# EAGLE board STM32G0_Breakout_Board (EAGLE 9.4.2)
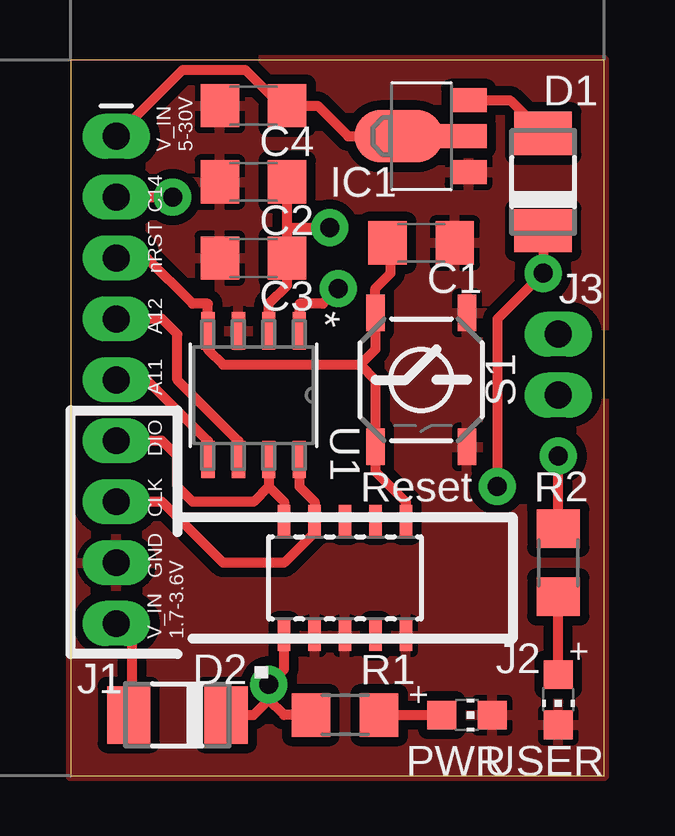
[diagram p0: board, top side]
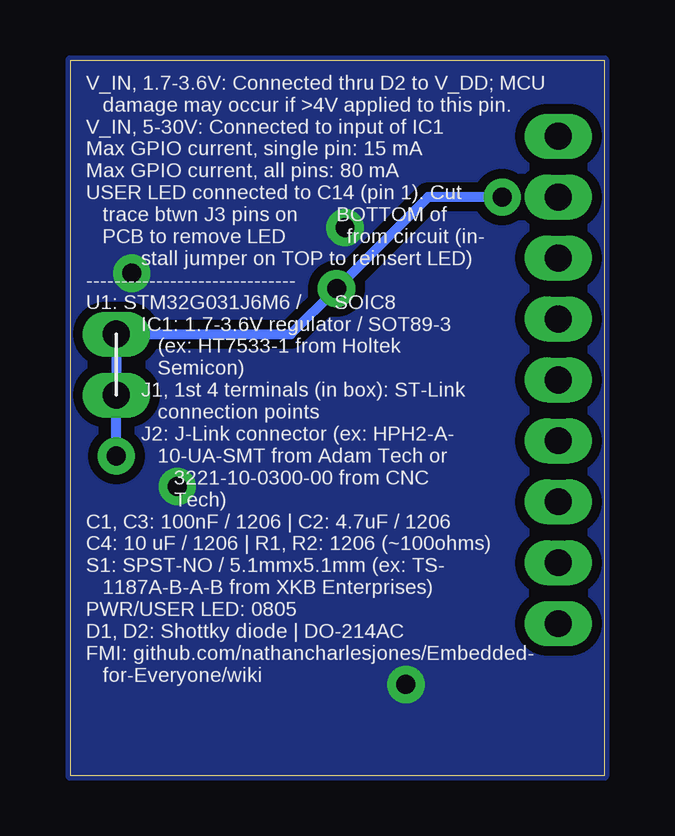
[diagram p1: board, bottom side, seen from below]

Size 22.23 x 29.84 mm. Coordinates in mm from the lower left corner, seen from the top.
Outline: 0,0 22.23,0 22.23,29.84 0,29.84 0,0
Copper layers (1*16): Top 0.035mm / dielectric 1.5mm / Bottom 0.035mm
Design rules "OthermillDRC_1_64_v2": minimum track width 16mil, minimum drill 31mil, track to track 0.39878125mm, track to pad 0.39878125mm, pad to pad 0.39878125mm, via to via 0.39878125mm, smd to smd 0mil, copper to edge 0mil, drill to drill 1mil, minimum pad ring 0mil, minimum via ring 15mil, stop-mask expansion 1mil, vias tented up to drill 30mil, thermal gap 10mil
tKeepout: area 18.4,14.6 to 22.2,19.7
bKeepout: area 0,5.1 to 3.8,27.9

## Footprints (pad centres in the part's own frame; a part is rotated, then mirrored left to right if it is on the bottom)
C1206 = smd 1.6 x 1.8: 1 -1.4,0; 2 1.4,0
1206 = smd 1.6 x 1.8: 1 -1.4,0; 2 1.4,0
DO-214AC = smd 1.8 x 2.4: A 2.025,0; C -2.025,0
SOT89 = smd 1 x 1.5: 1 -1.499,-1.981; 3 1.499,-1.981 | smd 1 x 2: 2 0,-1.727 | smd 2.2 x 3.7: 2@1 0,0.94
1X09_LONGPADS = drill 1.118 pad 1.88 long: 1 0,0; 2 2.54,0; 3 5.08,0; 4 7.62,0; 5 10.16,0; 6 12.7,0; 7 15.24,0; 8 17.78,0; 9 20.32,0
SAMTECH_FTSH-105-01 = smd 0.508 x 1.27: 1 -2.54,-2.413; 2 -2.54,2.413; 3 -1.27,-2.413; 4 -1.27,2.413; 5 0,-2.413; 6 0,2.413; 7 1.27,-2.413; 8 1.27,2.413; 9 2.54,-2.413; 10 2.54,2.413
1X02_LONGPADS = drill 1.118 pad 1.88 long: 1 0,0; 2 2.54,0
CHIP-LED0805 = smd 1.2 x 1.2: A 0,-1.05; C 0,1.05
R1206 = smd 1.6 x 1.803: 1 -1.422,0; 2 1.422,0
TACTILE_SWITCH_SMD_5.2MM = smd 1.524 x 0.762: 1 -2.794,1.905; 2 2.794,1.905; 3 -2.794,-1.905; 4 2.794,-1.905
SO-8 = smd 1.549 x 0.559: 1 -2.68,1.905; 2 -2.68,0.635; 3 -2.68,-0.635; 4 -2.68,-1.905; 5 2.68,-1.905; 6 2.68,-0.635; 7 2.68,0.635; 8 2.68,1.905

## Placement (x,y rotation side)
C1  100nF  [C1206]  14.61,22.23 0 top
C2  4.7uF  [1206]  7.62,24.77 180 top
C3  100nF  [C1206]  7.62,21.59 180 top
C4  10uF  [C1206]  7.62,27.94 180 top
D1  [DO-214AC]  19.68,24.77 90 top
D2  [DO-214AC]  4.45,2.54 180 top
FRAME1  FRAME-LETTERNO_PACKAGE  [DUMMY]  0,6.35 0 top
IC1  MCP170312MB  [SOT89]  14.61,26.67 90 top
J1  [1X09_LONGPADS]  1.91,6.35 90 top
J2  CORTEX_DEBUG_SMD  [SAMTECH_FTSH-105-01]  11.43,8.26 0 top
J3  [1X02_LONGPADS]  20.32,15.88 90 top
PWR  [CHIP-LED0805]  16.51,2.54 270 top
R1  100  [R1206]  11.43,2.54 180 top
R2  100  [R1206]  20.32,8.89 90 top
S1  MOMENTARY-SWITCH-SPST-SMD-5.2-REDUNDANT  [TACTILE_SWITCH_SMD_5.2MM]  14.61,16.51 270 top
U1  STM32G0_SO8_T2  [SO-8]  7.62,15.88 270 top
USER  [CHIP-LED0805]  20.32,3.17 180 top

## Library data of the parts
C1 C3 C4 PWR USER = adafruit
C2 = SparkFun-Capacitors; PROD_ID: CAP-10300
D1 D2 = diode
FRAME1 = SparkFun-Aesthetics; DESIGNER: Nathan Jones; VERSION: v01
IC1 = linear
J1-J3 = SparkFun-Connectors
R1 R2 = rcl; SPICEPREFIX: R
S1 = SparkFun-Switches; PROD_ID: SWCH-08247; SF_SKU: COM-08720
U1 = STM32G0; MANUFACTURER_PART_NUMBER: STM32G0_SO8_T2; VENDOR: STMicroelectronics

## Nets
GND: C1.2 C2.2 C3.2 C4.2 IC1.1 J1.2 J2.3 J2.5 J2.9 PWR.C S1.1 S1.2 U1.3 USER.C
N$1: R2.1 USER.A
N$2: D2.A J1.1
N$3: C4.1 IC1.2@1 J1.9
N$4: PWR.A R1.1
N$5: D1.A IC1.3
NRST/PA0/PA1/PA2: C1.1 J1.7 J2.10 S1.3 S1.4 U1.4
PA12: J1.6 U1.6
PB0/PB1/PA8/PA11: J1.5 U1.5
PC14: J1.8 J3.1 J3.2 R2.2 U1.1
SWDCLK: J1.3 J2.4 U1.8
SWDIO: J1.4 J2.2 U1.7
VCC: C2.1 C3.1 D1.C D2.C J2.1 R1.2 U1.2

## Tracks (layer width: path | path; a pad name or v marks a point on that pad's centre or on a via)
GND
  pour Top: 0,0 22.23,0 22.23,29.84 0,29.84
N$1
  Top 0.406: USER.A R2.1
N$2
  Top 0.406: J1.1 2.54,5.71 2.54,2.66 D2.A
N$3
  Top 0.406: J1.9 4.68,29.44 7.27,29.44 8.77,27.94 C4.1 10.29,27.94 11.56,26.67 IC1.2@1
N$4
  Top 0.406: R1.1 PWR.A
N$5
  Top 0.406: IC1.3 18.31,28.17 D1.A
NRST/PA0/PA1/PA2
  Top 0.406: J1.7 3.17,21.59 5.08,19.68 5.71,19.68 U1.4 5.71,17.78 6.35,17.14 12.06,17.14 | 12.06,17.14 12.7,16.51 S1.4 12.7,12.7 13.97,11.43 J2.10 | 12.06,17.14 12.7,17.78 S1.3 12.7,20.32 13.34,20.95 13.34,22.09 C1.1
PA12
  Top 0.406: U1.6 6.99,13.97 4.45,16.51 4.45,18.41 3.81,19.05 J1.6
PB0/PB1/PA8/PA11
  Top 0.406: U1.5 5.71,13.97 3.17,16.51 J1.5
PC14  (via drill 0.79)
  Top 0.406: R2.2 v20.32,13.34 | v11.15,20.32 10.51,19.68 9.53,19.68 U1.1 | J1.8 v4.25,24.13
  Bottom 0.406: v20.32,13.34 J3.1 J3.2 13.05,18.41 v11.15,20.32 7.34,24.13 v4.25,24.13
SWDCLK
  Top 0.406: U1.8 9.53,12.06 10.16,11.43 J2.4 10.16,10.16 8.89,8.89 6.35,8.89 3.81,11.43 J1.3
SWDIO
  Top 0.406: U1.7 8.26,12.06 | 8.26,12.06 8.89,11.43 J2.2 | 8.26,12.06 7.62,11.43 5.08,11.43 4.45,12.06 4.45,13.34 3.81,13.97 J1.4
VCC  (via drill 0.79)
  Top 0.406: D2.C 7.62,2.54 8.26,3.17 | 8.26,3.17 v8.26,3.81 8.89,4.45 J2.1 | R1.2 8.89,2.54 8.26,3.17 | D1.C v19.68,20.95 17.78,19.05 v17.78,12.06 | U1.2 8.26,19.68 9.02,20.45 C3.1 9.02,22.86 | 9.02,22.86 C2.1 | 9.02,22.86 v10.79,22.86
  pour Bottom: 0,0 22.23,0 22.23,29.84 0,29.84

## Text on the board
tNames: V_IN / 5-30V | C14 | nRST | A12 | A11 | DIO | CLK | Reset | GND | V_IN / 1.7-3.6V | .
bNames: V_IN, 1.7-3.6V: Connected thru D2 to V_DD; MCU / damage may occur if >4V applied to this pin. / V_IN, 5-30V: Connected to input of IC1 / Max GPIO current, single pin: 15 mA / Max GPIO current, all pins: 80 mA / USER LED connected to C14 (pin 1). Cut / trace btwn J3 pins on BOTTOM of / PCB to remove LED from circuit (in- / stall jumper on TOP to reinsert LED) / ------------------------------ / U1: STM32G031J6M6 / SOIC8 / IC1: 1.7-3.6V regulator / SOT89-3 / (ex: HT7533-1 from Holtek / Semicon) / J1, 1st 4 terminals (in box): ST-Link / connection points / J2: J-Link connector (ex: HPH2-A- / 10-UA-SMT from Adam Tech or / 3221-10-0300-00 from CNC / Tech) / C1, C3: 100nF / 1206 | C2: 4.7uF / 1206 / C4: 10 uF / 1206 | R1, R2: 1206 (~100ohms) / S1: SPST-NO / 5.1mmx5.1mm (ex: TS- / 1187A-B-A-B from XKB Enterprises) / PWR/USER LED: 0805 / D1, D2: Shottky diode | DO-214AC / FMI: github.com/nathancharlesjones/Embedded- / for-Everyone/wiki